# Altium PCB ControlBoard.PcbDoc (part 2 of 2)
Units mm, origin at the board's own origin, x right, y up, seen from the top; angles counter-clockwise.
Board outline 162.9 x 88.2 mm, 2 copper layers (Top Layer, Bottom Layer); 121 components, 97 nets, 597 pads, 175 vias.
Unrouted connection lines stored in the file: 4.
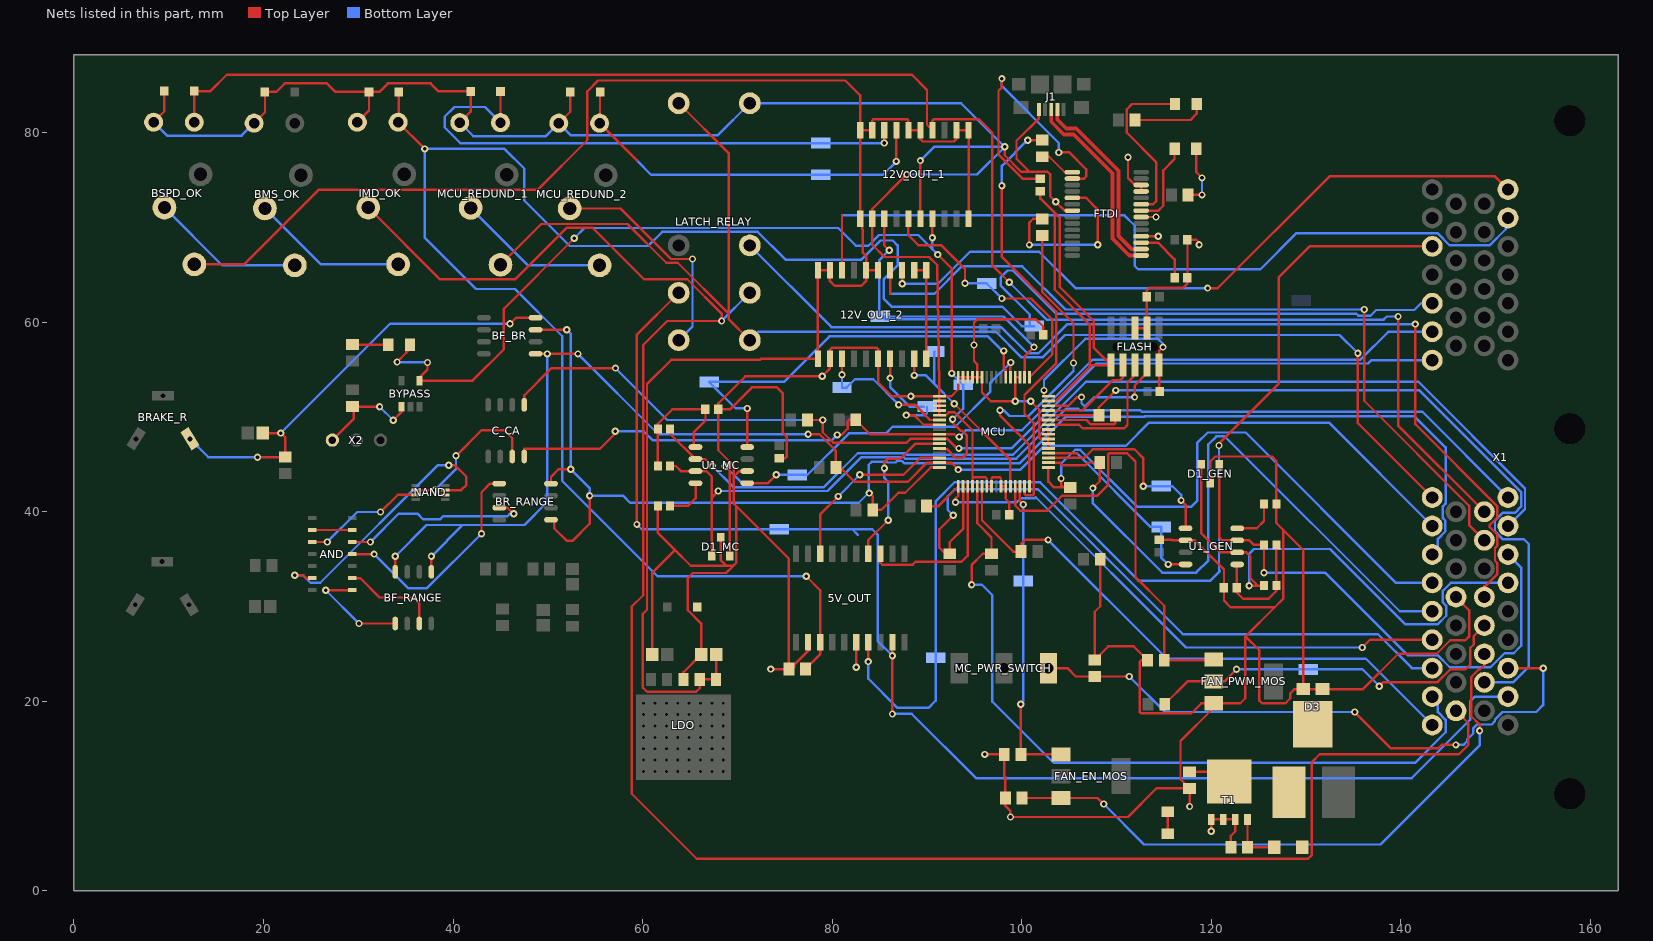
[diagram p2: the nets of this part, all layers, seen from the top]

## Via types
v1: diameter 0.762, hole 0.381, Top Layer to Bottom Layer, 175 vias

## Nets (pads, with @x,y where several pads share a name; then routed paths per layer and width w, separated by ;. In a path a pad name is that pad's centre, name@x,y a point inside that pad or via, vN(x,y) a via of type N, cw(c..) or ccw(c..) an arc to the next point about the centre after c; other vN are vias at no path point) (continued)
BRAKE_PRESSURE_FRONT: BF_BR.3 BR_RANGE.1 BR_RANGE.4 MCU.32 R14.2 X1.A7 | length 155.2
  Top Layer w0.254: BF_BR.3@48.725,59.196 v1(52,59.196) ; BR_RANGE.1@50.325,39.156 50.675,39.156 50.675,38.245 51.997,36.923 52.593,36.923 54.4,38.73 v1(54.4,41.7) ; BR_RANGE.4@50.325,42.966 50.325,43.673 51.149,44.497 v1(52.4,44.497) ; v1@83.982,41.935 84.275,41.642 R14.2@84.275,40.2 85.175,40.2 86.975,42 87.7,42 90.385,44.685 MCU.32@91.3,44.685
  Bottom Layer w0.254: v1(52,59.196) 52.4,58.796 v1(52.4,44.497) 54.4,42.497 v1(54.4,41.7) 57.931,41.7 58.674,40.957 82.791,40.957 v1@83.845,42.012 ; v1@83.982,41.935 v1(83.914,41.974) v1@83.845,42.012 ; X1.A7@143.3,35.5 143.891,35.5 143.891,37.141 144.679,37.929 144.679,39.071 144.421,39.329 144.421,40.571 144.704,40.854 144.704,46.787 141.427,50.063 112.981,50.063 112.951,50.034 104.678,50.034 99.744,45.1 93.578,45.1 93.568,45.11 93.021,45.11 93.011,45.1 87.633,45.1 87.373,45.36 86.827,45.36 86.667,45.2 85.833,45.2 85.773,45.26 84.147,45.26 83.845,44.958 v1@83.845,42.012
BRAKE_PRESSURE_REAR: BF_BR.1 BF_RANGE.1 BF_RANGE.4 MCU.31 R17.2 X1.A8 | length 150.9
  Top Layer w0.254: BF_RANGE.4@33.895,33.662 v1(33.895,35.297) ; BF_RANGE.1@37.705,33.662 v1(37.705,35.297) ; BF_BR.1@48.725,56.656 v1(49.936,56.656) v1(53.176,56.656) ; v1(77.455,48.185) 78.637,48.185 80.375,46.447 R17.2@80.375,44.685 80.848,44.685 82.379,43.155 87.958,43.155 89.988,45.185 MCU.31@91.3,45.185 92.559,45.185 v1(93.294,44.45)
  Bottom Layer w0.254: v1(33.895,35.297) 37.198,38.6 41.008,38.6 ; v1(37.705,35.297) 41.008,38.6 ; v1(49.936,56.656) 49.936,41.021 47.515,38.6 41.008,38.6 ; v1(53.176,56.656) 61.647,48.185 v1(77.455,48.185) ; v1(93.294,44.45) 99.85,44.45 102.356,46.956 110.956,46.956 113.4,49.4 132.4,49.4 X1.A8@143.3,38.5
BRAKE_REAR_POT: BF_BR.4 BRAKE_R.1 C15.2 R6.1 | length 47.4
  Top Layer w0.254: v1(19.357,45.761) 19.368,45.772 R6.1@22.3,45.772 22.3,47.819 v1(21.819,48.3) C15.2@19.925,48.3 ; v1(46.001,59.833) 46.634,60.466 BF_BR.4@48.725,60.466
  Bottom Layer w0.254: BRAKE_R.1@12.24,47.692 14.171,45.761 v1(19.357,45.761) ; v1(21.819,48.3) 33.352,59.833 v1(46.001,59.833)
BRK_RANGE_OK: AND.6 AND.9 | length 4.2
  Top Layer w0.254: AND.9@25.155,38.077 AND.6@29.366,38.077
BSPD_OK: 1.2 12V_OUT_1.14 BSPD_OK.COIL1 X1.A25 | length 178.2
  Top Layer w0.254: BSPD_OK.COIL1@12.699,81.1 12.675,81.124 1.2@12.675,84.386 14.4,84.386 16.114,86.1 88.4,86.1 90,84.5 90,80.827 12V_OUT_1.14@90.57,80.257 90.57,81.28 90.722,81.432 95.453,81.432 96.901,79.985 96.901,65.989 v1(98.673,64.218) ; v1(139.7,60.6) 139.7,49.1 X1.A25@148.8,40
  Bottom Layer w0.254: v1(98.673,64.218) 102.615,60.275 138.175,60.275 138.5,60.6 v1(139.7,60.6)
BSPD_OK_5V: 12V_OUT_1.7 bspd_ok.1 BSPD_OK.1 BYPASS.4 MCU.28 | length 105.4
  Top Layer w0.254: v1(34.087,55.804) 35.052,56.769 ; v1(37.3,55.749) 37.3,55.015 36.45,54.166 BYPASS.4@36.45,53.836 42.05,53.836 45.339,57.125 45.339,61.41 v1(52.785,68.856) ; v1(90.57,68.904) 12V_OUT_1.7@90.57,70.907 ; v1(91.135,67.132) 92.6,65.667 v1(92.6,54.6) ; MCU.28@91.3,46.685 91.371,46.614 92.091,46.614 93.02,45.685 93.749,45.685 94.2,46.136 94.2,48.033 93.673,48.56 93.532,48.56 92.7,49.392 v1(92.7,49.765) ; 35.052,56.769 35.052,57.636 BSPD_OK.1@35.45,57.636 35.45,57.167 35.052,56.769
  Bottom Layer w0.254: v1(34.087,55.804) 34.087,55.794 37.371,55.794 37.326,55.749 v1(37.3,55.749) ; v1(52.785,68.856) 53.864,69.935 80.636,69.935 82.499,68.072 83.82,68.072 84.948,69.2 89.067,69.2 90.57,67.697 ; v1(90.57,68.904) 90.57,67.697 ; v1(91.135,67.132) 90.57,67.697 ; v1(92.6,54.6) bspd_ok.1@93.8,53.4 93.8,50.865 v1(92.7,49.765) v1@92.7,49.622
CAN_H_GEN: D1_GEN.1 R3_GEN.2 U1_GEN.7 X1.A32 | length 58.1
  Top Layer w0.254: D1_GEN.1@120.85,45 120.85,37.283 121.148,36.985 U1_GEN.7@122.725,36.985 124.015,36.985 124.5,36.5 R3_GEN.2@125.55,36.5 v1(125.55,33.556)
  Bottom Layer w0.254: v1(125.55,33.556) 132.027,33.556 140.704,24.879 143.871,24.879 145.154,23.597 149.446,23.597 150.92,25.07 151.892,25.07 152.679,25.857 152.679,34.121 X1.A32@151.3,35.5
CAN_H_MC: D1_MC.1 R3_MC.2 U1_MC.7 X1.A34 | length 105.1
  Top Layer w0.254: R3_MC.2@62.9,44.827 63.489,44.827 64.024,44.292 U1_MC.7@65.575,44.292 66.708,44.292 67.3,43.7 67.3,41.519 ; D1_MC.1@67.3,35.332 67.3,41.519 ; v1(67.97,42.189) 67.3,41.519
  Bottom Layer w0.254: v1(67.97,42.189) 79.502,42.189 83.078,45.766 87.542,45.766 87.707,45.6 99.392,45.6 104.658,50.865 105.955,50.865 106.127,50.694 112.505,50.694 112.653,50.546 142.254,50.546 X1.A34@151.3,41.5
CAN_L_GEN: D1_GEN.2 R2_GEN.1 U1_GEN.6 X1.A31 | length 56.5
  Top Layer w0.254: D1_GEN.2@118.95,45 118.95,37.723 120.958,35.715 U1_GEN.6@122.725,35.715 123.685,35.715 124.1,35.3 124.1,33.02 124.92,32.2 ; v1(123.977,32.2) 124.92,32.2 ; R2_GEN.1@125.55,32.2 124.92,32.2
  Bottom Layer w0.254: v1(123.977,32.2) 123.977,35.56 124.485,36.068 132.512,36.068 140.462,28.118 143.868,28.118 144.78,29.03 144.78,30.07 144.421,30.429 144.421,31.671 145.25,32.5 X1.A31@151.3,32.5
CAN_L_MC: D1_MC.2 R2_MC.1 U1_MC.6 X1.A33 | length 122
  Top Layer w0.254: R2_MC.1@62.9,48.727 62.9,48.237 U1_MC.6@65.575,45.562 66.605,45.562 v1(67.361,44.806) ; v1(68.707,44.806) 69.19,44.323 69.19,37.363 ; 69.19,37.363 69.2,37.353 D1_MC.2@69.2,35.332 69.19,37.363
  Bottom Layer w0.254: v1(67.361,44.806) 69.571,42.596 70.917,42.596 ; v1(68.707,44.806) 70.917,42.596 ; X1.A33@151.3,38.5 153.085,40.285 153.085,42.47 141.834,53.721 106.763,53.721 99.048,46.006 87.876,46.006 87.71,46.172 82.697,46.172 79.121,42.596 70.917,42.596
CURRENT_SENSE_HIGH: C_CA.1 MCU.26 R20.2 X1.B1 | length 108.3
  Top Layer w0.254: C_CA.1@47.505,51.286 47.505,52.278 50.383,55.156 v1(57.137,55.156) ; R20.2@77.375,49.685 v1(79,49.685) ; v1@79.248,49.685 v1(79,49.685) ; v1(93.36,46.685) 93.157,46.685 92.157,47.685 MCU.26@91.3,47.685 88.249,47.685 87.859,47.295 80.102,47.295 79,48.396 v1(79,49.685)
  Bottom Layer w0.254: v1(57.137,55.156) 57.137,55.144 62.597,49.685 v1(79,49.685) ; v1(93.36,46.685) 98.92,46.685 107.878,55.643 136.525,55.643 136.882,56 X1.B1@143.3,56
CURRENT_SENSE_LOW: C_CA.8 MCU.25 R22.2 X1.B2 | length 104.7
  Top Layer w0.254: C_CA.8@47.505,45.836 47.505,46.634 55.474,46.634 57.1,48.261 v1(57.1,48.5) ; v1(80.518,48.108) 80.975,48.108 81.636,48.768 81.636,49.548 81.788,49.7 R22.2@82.475,49.7 83.99,48.185 MCU.25@91.3,48.185 92.869,48.185 ; 92.871,48.185 92.869,48.185 ; v1(93.4,47.9) 93.154,47.9 92.869,48.185
  Bottom Layer w0.254: v1(57.1,48.5) 60.1,48.5 61.075,47.525 79.935,47.525 v1(80.518,48.108) ; v1@93.314,47.9 v1(93.4,47.9) 94.1,48.6 100.035,48.6 107.484,56.049 135.729,56.049 138.68,59 X1.B2@143.3,59
D_N: FTDI.16 J1.2 | length 19.6
  Top Layer w0.381: J1.2@103.75,82.425 103.75,81.385 104.7,80.435 105.728,80.435 110.2,75.963 110.2,69.085 111.571,67.714 FTDI.16@112.586,67.714
D_P: FTDI.15 J1.3 | length 20.6
  Top Layer w0.381: J1.3@103.1,82.425 103.1,81.137 104.437,79.8 105.465,79.8 109.565,75.7 109.565,68.822 111.349,67.038 FTDI.15@112.586,67.038
DCDC_DISABLE: 12V_OUT_2.13 X1.B26 | length 73.8
  Top Layer w0.254: v1(87.375,64.059) 12V_OUT_2.13@87.375,65.475 ; v1(119.6,63.6) 120.674,63.6 132.461,75.387 149.913,75.387 X1.B26@151.3,74
  Bottom Layer w0.254: v1(87.375,64.059) 91.161,64.059 94.539,67.437 101.829,67.437 105.562,63.703 ; 105.563,63.704 105.667,63.6 v1(119.6,63.6)
DCDC_DISABLE_5V: 12V_OUT_2.9 dcdc_dis.1 MCU.44 | length 21.8
  Top Layer w0.254: v1(88.645,54.385) 12V_OUT_2.9@88.645,56.125 ; v1(92.869,51.4) 98.8,45.469 MCU.44@98.8,42.685
  Bottom Layer w0.254: v1(88.645,54.385) 89.884,54.385 90.751,53.518 ; dcdc_dis.1@90.8,56.9 90.751,56.851 90.751,53.518 ; v1(92.869,51.4) 90.751,53.518
DGND: 1.1 2.1 3.1 4.1 5.1 5V_OUT.2 5V_OUT.6 12V_OUT_1.2 12V_OUT_1.6 12V_OUT_2.2 12V_OUT_2.6 BMS_OK.COIL2 BSPD_OK.COIL2 C1_GEN.1 C1_MC.1 C2_GEN.1 C2_MC.1 C3.1 C4.1 C5.1 C6.1 C8.1 C10.1 C11.1 D1_GEN.3 D1_MC.3 D3.1 D3.2 FAN_PWM_MOS.3 FLASH.3 FLASH.5 FTDI.7 FTDI.18 FTDI.21 FTDI.25 FTDI.26 IMD_OK.COIL2 J1.5 LATCH_RELAY.1 LDO.3 MCU.3 MCU.4 MCU.11 MCU.12 MCU.13 MCU.14 MCU.15 MCU.16 MCU.17 MCU.18 MCU.19 MCU.20 MCU.21 MCU.36 MCU.39 MCU.40 MCU.42 MCU.43 MCU.53 MCU.54 MCU.55 MCU.56 MCU.57 MCU.59 MCU_REDUND_1.COIL2 MCU_REDUND_2.COIL2 R1_GEN.1 R1_MC.1 R12.2 R15.2 R18.2 R26.1 R27.1 R28.1 R29.1 R31.1 R32.1 T1.1 T1.2 T1.3 U1_GEN.2 U1_MC.2 X1.A14 | length 621
  Top Layer w0.254: BSPD_OK.COIL2@8.399,81.1 9.525,82.226 1.1@9.525,84.386 ; BMS_OK.COIL2@18.999,81 20.149,82.15 2.1@20.149,84.3 21.339,84.3 22.236,85.198 26.68,85.198 27.578,84.3 3.1@31.125,84.3 ; IMD_OK.COIL2@29.899,81.1 31.125,82.326 3.1@31.125,84.3 ; MCU_REDUND_1.COIL2@40.699,81.056 41.849,82.206 4.1@41.849,84.356 38.456,84.356 37.62,85.192 33.122,85.192 32.23,84.3 3.1@31.125,84.3 ; MCU_REDUND_2.COIL2@51.15,81 52.35,82.2 5.1@52.35,84.3 ; C4.1@61,24.95 61,33.528 63.421,35.949 ; R1_MC.1@61.6,40.627 61.6,37.769 63.421,35.949 ; LDO.3@64.3,22.325 64.3,23.071 66.163,24.934 C3.1@66.163,24.95 66.163,28.217 64.77,29.61 64.77,33.02 65.288,33.538 68.802,33.538 69.564,34.3 ; D1_MC.3@68.25,37.332 68.25,34.872 68.809,34.313 69.577,34.313 ; U1_MC.2@71.025,44.292 70.208,44.292 69.604,43.688 ; v1(73.5,23.4) R12.2@75.425,23.4 ; C1_MC.1@74.4,45.641 75.038,45.641 75.19,45.794 75.19,47.953 74.759,48.385 74.759,52.525 74.168,53.115 71.52,53.115 69.204,50.8 C2_MC.1@67.975,50.8 ; 5V_OUT.2@77.455,26.225 77.455,25.324 76,23.87 76,23.604 75.796,23.4 R12.2@75.425,23.4 ; v1(82.535,23.6) 5V_OUT.6@82.535,26.225 ; v1(87.849,75.585) 84.22,71.956 12V_OUT_1.2@84.22,70.907 84.22,68.17 85.514,66.876 90.224,66.876 91.072,66.028 91.3,53.3 MCU.17@91.3,52.185 ; 12V_OUT_1.6@89.3,70.907 v1(89.3,77.049) ; MCU.36@94.8,42.685 94.8,43.508 ; v1(96.1,14.4) R26.1@98.145,14.4 98.145,12.162 98.27,12.037 R27.1@98.27,9.8 98.27,8.964 98.8,8.434 v1(98.8,7.8) 111.2,7.8 114.225,10.825 R32.1@117.7,10.825 ; v1(98.2,78.5) 98.2,77.608 99.93,75.878 100.804,75.878 ; C8.1@98.675,39.7 98.675,40.993 98.3,41.368 MCU.43@98.3,42.685 MCU.42@97.8,42.685 97.8,43.508 97.648,43.66 96.952,43.66 96.8,43.508 MCU.40@96.8,42.685 MCU.39@96.3,42.685 96.3,43.508 96.148,43.66 94.952,43.66 94.8,43.508 ; MCU.3@99.8,54.185 MCU.4@99.3,54.185 v1(99.3,51.661) 96.739,51.661 95.8,52.6 MCU.11@95.8,54.185 MCU.12@95.3,54.185 ; v1(100.946,51.661) 101.835,50.772 101.835,49.558 ; J1.5@101.8,82.425 101.8,81.502 99.441,79.143 99.441,77.241 100.804,75.878 ; C6.1@102.275,58.7 102.275,59.512 101.487,60.3 95.3,60.3 94.952,59.952 v1(94.952,57.6) 94.952,55.902 95.3,55.555 MCU.12@95.3,54.185 ; MCU.53@102.8,46.685 MCU.54@102.8,47.185 MCU.55@102.8,47.685 ; MCU.57@102.8,48.685 MCU.56@102.8,48.185 MCU.55@102.8,47.685 ; FTDI.7@105.336,71.77 104.5,71.77 v1(103.57,72.7) 103,73.27 103,75.592 102.713,75.878 100.804,75.878 ; R15.2@108.275,35 108.275,30.024 107.7,29.449 R29.1@107.7,24.375 109.125,25.8 111.815,25.8 R28.1@113.275,24.34 112.588,24.34 112.452,24.204 112.452,18.87 112.579,18.743 117.888,18.743 118.945,19.8 FAN_PWM_MOS.3@120.193,19.8 ; R18.2@109.875,50.185 109.875,49.35 109.748,49.223 107.271,49.223 106.809,49.685 MCU.59@102.8,49.685 ; v1(111.2,77.4) 111.2,75.214 111.792,74.621 112.439,74.621 FTDI.26@112.586,74.474 FTDI.25@112.586,73.798 ; FLASH.5@111.945,59.375 FLASH.3@113.215,59.375 113.175,59.415 C5.1@113.175,62.7 113.175,63.32 113.51,63.655 117.055,63.655 117.475,64.075 C11.1@117.475,64.7 C10.1@117.475,68.7 118.4,68.7 118.7,68.4 v1(118.7,68.17) ; FTDI.18@112.586,69.066 v1(114.4,69.066) ; FTDI.21@112.586,71.094 v1(114.152,71.094) ; C1_GEN.1@114.5,37.065 115.83,37.065 115.91,36.985 U1_GEN.2@117.275,36.985 118.244,36.985 121.325,33.904 C2_GEN.1@121.325,32 121.325,30.622 122.028,29.919 126.676,29.919 ; v1(117.7,8.9) R32.1@117.7,10.825 ; D1_GEN.3@119.9,43 119.9,45.323 120.413,45.836 126.379,45.836 126.85,45.365 R1_GEN.1@126.85,40.8 126.85,38.813 127.565,38.098 ; v1(119.995,6.297) T1.1@119.995,7.544 T1.2@121.265,7.544 T1.3@122.535,7.544 122.535,6.297 122.055,5.817 R31.1@122.055,4.6 ; X1.A14@145.8,31 147.193,29.607 147.193,26.822 146.812,26.441 145.192,26.441 143.769,25.019 139.712,25.019 135.987,21.294 D3.1@131.716,21.294 D3.2@129.684,21.294 ; 63.421,35.949 65.069,34.3 69.564,34.3 ; C2_MC.1@67.975,50.8 67.975,46.492 69.604,44.862 69.604,43.688 ; C2_MC.1@67.975,50.8 67.975,51.44 70.835,54.3 v1(78.937,54.3) 79.755,55.118 12V_OUT_2.2@79.755,56.125 79.755,57.097 79.958,57.3 84.69,57.3 84.835,57.155 12V_OUT_2.6@84.835,56.125 84.835,53.665 86.315,52.185 v1(88.3,52.185) MCU.17@91.3,52.185 ; 69.564,34.3 69.577,34.313 ; 69.577,34.313 69.882,34.618 69.882,40.589 ; 69.604,43.688 69.604,40.866 69.882,40.589 ; 69.882,40.589 75.425,35.046 R12.2@75.425,23.4 ; MCU.17@91.3,52.185 MCU.18@91.3,51.685 MCU.19@91.3,51.185 MCU.20@91.3,50.685 MCU.21@91.3,50.185 91.985,50.185 92.3,50.5 92.899,50.5 93.36,50.039 93.5,49.899 93.5,49.894 94.8,48.594 94.8,43.508 ; MCU.17@91.3,52.185 92.564,52.185 93.3,52.921 MCU.16@93.3,54.185 MCU.15@93.8,54.185 MCU.14@94.3,54.185 MCU.13@94.8,54.185 MCU.12@95.3,54.185 ; 101.835,49.558 101.899,49.622 ; 101.835,49.558 101.835,47.812 101.962,47.685 MCU.55@102.8,47.685 ; 101.899,49.622 101.962,49.685 MCU.59@102.8,49.685 ; 101.899,49.622 MCU.59@102.8,49.685 ; R32.1@117.7,10.825 116.738,11.787 116.738,15.824 120.193,19.279 FAN_PWM_MOS.3@120.193,19.8 ; FAN_PWM_MOS.3@120.193,19.8 FAN_PWM_MOS.3@120.25,19.8 123.044,19.8 123.577,20.333 123.577,26.82 123.608,26.851 ; 123.608,26.851 126.676,29.919 ; 123.608,26.851 125.07,25.389 125.07,20.066 125.336,19.8 127.801,19.8 128.321,20.32 128.321,20.837 128.778,21.294 D3.2@129.684,21.294 ; 126.676,29.919 127.565,30.808 127.565,38.098 ; 127.565,38.098 129.684,35.979 D3.2@129.684,21.294
  Bottom Layer w0.254: BSPD_OK.COIL2@8.399,81.1 9.813,79.686 17.685,79.686 BMS_OK.COIL2@18.999,81 ; MCU_REDUND_1.COIL2@40.699,81.056 42.12,79.635 49.785,79.635 MCU_REDUND_2.COIL2@51.15,81 52.445,79.705 67.905,79.705 LATCH_RELAY.1@71.3,83.1 93.6,83.1 v1(98.2,78.5) ; v1(87.849,75.585) 95.285,75.585 v1(98.2,78.5) ; v1(89.3,77.049) 90.751,78.5 v1(98.2,78.5) ; v1(99.3,51.661) v1(100.946,51.661)
FAN: FAN_PWM_MOS.1 MCU.45 R28.2 | length 47.2
  Top Layer w0.254: MCU.45@99.3,42.685 99.3,40.659 99.854,40.105 102.668,40.105 104.267,41.705 107.982,41.705 109.099,42.822 109.099,46.048 109.226,46.175 111.106,46.175 111.995,45.286 111.995,33.119 115.025,30.089 R28.2@115.025,24.34 120.19,24.34 FAN_PWM_MOS.1@120.25,24.4
FAN_ENABLE_DRIVE: FAN_EN_MOS.3 R27.2 X1.A20 | length 65.3
  Top Layer w0.254: R27.2@100.02,9.8 FAN_EN_MOS.3@104.15,9.8 108.001,9.8 v1(108.631,9.169) ; v1(148.3,16.9) 148.3,17.55 147.421,18.429 147.421,22.571 148.229,23.379 148.336,23.379 148.8,23.843 X1.A20@148.8,25
  Bottom Layer w0.254: v1(108.631,9.169) 108.636,9.169 112.905,4.9 137.844,4.9 148.3,15.356 v1(148.3,16.9)
FAN_ENABLE_MCU: fan_en.1 FAN_EN_MOS.1 MCU.46 R26.2 | length 32.8
  Top Layer w0.254: MCU.46@99.8,42.685 99.8,41.123 v1(100.159,40.765) ; v1(99.895,19.695) R26.2@99.895,14.4 FAN_EN_MOS.1@104.15,14.4
  Bottom Layer w0.254: v1(99.895,19.695) 100.159,19.959 fan_en.1@100.159,32.7 v1(100.159,40.765)
FAN_PWM: fan_pwm.1 FAN_PWM_MOS.2 R25.1 X1.A21 | length 40.2
  Top Layer w0.254: R25.1@115.075,19.7 117.475,22.1 FAN_PWM_MOS.2@120.25,22.1 121.372,22.1 v1(122.651,23.379) ; v1(137.719,21.59) 138.151,22.022 143.872,22.022 145.229,23.379 146.812,23.379 147.32,23.887 147.32,25.654 147.676,26.01 147.676,26.876 X1.A21@148.8,28
  Bottom Layer w0.254: v1(122.651,23.379) fan_pwm.1@130.2,23.379 135.93,23.379 v1(137.719,21.59)
FTDI_GREEN: FTDI.23 FTDI_GRN.2 | length 18
  Top Layer w0.254: FTDI.23@112.586,72.446 113.846,72.446 114.2,72.8 114.2,76.863 111.081,79.982 111.081,82.472 111.631,83.022 FTDI_GRN.2@116.162,83.022
FTDI_RED: FTDI.22 FTDI_RED.2 | length 9.1
  Top Layer w0.254: FTDI.22@112.586,71.77 114.408,71.77 114.916,72.278 114.916,74.916 114.916,76.02 116.112,77.216 FTDI_RED.2@116.112,78.297
FTDI_UART_RX: MCU.48 R34.2 | length 34.9
  Top Layer w0.254: v1(97.7,50.7) 97.7,50.15 100.8,47.05 MCU.48@100.8,42.685 ; R34.2@102.162,69.157 102.162,63.186 105.454,59.895 v1(105.454,55.7)
  Bottom Layer w0.254: v1(97.7,50.7) 98.109,50.7 98.709,50.1 100.705,50.1 105.454,54.848 v1(105.454,55.7)
FTDI_UART_TX: MCU.47 R33.2 | length 46.1
  Top Layer w0.254: v1(97.898,74.394) 97.898,66.876 103.613,61.161 103.613,55.649 100.286,52.321 100.286,50.34 101.251,49.375 101.251,41.857 101.124,41.73 100.427,41.73 100.3,41.857 MCU.47@100.3,42.685 ; v1(100.616,79.207) R33.2@102.162,79.207
  Bottom Layer w0.254: v1(97.898,74.394) 97.898,76.49 v1(100.616,79.207)
GLV: 12V_OUT_1.1 12V_OUT_1.10 12V_OUT_1.11 12V_OUT_1.12 12V_OUT_1.15 12V_OUT_1.16 12V_OUT_1.19 12V_OUT_1.20 12V_OUT_2.1 12V_OUT_2.10 12V_OUT_2.11 12V_OUT_2.12 12V_OUT_2.15 12V_OUT_2.16 12V_OUT_2.19 12V_OUT_2.20 BSPD_OK.COM C3.2 D2.2 D3.3 LDO.1 LDO.2 LDO_D.2 PTC.2 R32.2 RVP_LED.1 RVP_LED.2 T1.mb | length 224.5
  Top Layer w0.254: BSPD_OK.COM@12.699,66.1 17.942,66.1 25.806,73.965 48.92,73.965 54.153,79.197 54.153,84.353 55.299,85.5 81.378,85.5 82.95,83.928 12V_OUT_1.20@82.95,80.257 ; C3.2@67.763,24.95 67.763,22.348 LDO.1@67.74,22.325 LDO.2@66.02,22.325 66.02,21.384 65.64,21.004 60.458,21.004 60.027,21.435 60.027,29.233 60.458,29.664 60.458,53.464 63.024,56.031 72.412,56.031 72.507,56.125 12V_OUT_2.1@78.485,56.125 12V_OUT_2.20@78.485,65.475 12V_OUT_2.19@79.755,65.475 79.755,64.336 80.263,63.828 83.057,63.828 83.565,64.336 12V_OUT_2.16@83.565,65.475 ; 12V_OUT_2.15@84.835,65.475 12V_OUT_2.16@83.565,65.475 ; 12V_OUT_2.12@88.645,65.475 12V_OUT_2.11@89.915,65.475 12V_OUT_2.10@89.915,56.125 ; 12V_OUT_1.10@94.38,70.907 12V_OUT_1.11@94.38,80.257 12V_OUT_1.12@93.11,80.257 93.11,79.322 92.856,79.068 89.554,79.068 89.3,79.322 12V_OUT_1.15@89.3,80.257 12V_OUT_1.16@88.03,80.257 88.03,81.28 87.89,81.42 84.36,81.42 84.22,81.28 12V_OUT_1.19@84.22,80.257 12V_OUT_1.20@82.95,80.257 ; RVP_LED.1@115.4,6.05 RVP_LED.2@115.4,8.35 ; R32.2@117.7,12.575 120.125,12.575 121.156,11.544 T1.mb@121.9,11.544 ; 12V_OUT_1.20@82.95,80.257 12V_OUT_1.1@82.95,70.907 83.213,69.659 83.213,67.343 83.565,66.991 12V_OUT_2.16@83.565,65.475
IMD_OK: 3.2 5V_OUT.3 imd_ok.1 IMD_OK.COIL1 R12.1 X1.B3 | length 228.7
  Top Layer w0.254: 3.2@34.275,84.3 34.275,81.176 IMD_OK.COIL1@34.199,81.1 v1(37.016,78.283) ; R12.1@77.175,23.4 78.725,24.95 5V_OUT.3@78.725,26.225 78.725,31.725 v1(77.252,33.198)
  Bottom Layer w0.254: v1(77.252,33.198) 61.57,33.198 51.511,43.256 51.511,58.522 46.533,63.5 42.4,63.5 37.016,68.884 v1(37.016,78.283) 45.417,78.283 47.5,76.2 47.5,72.847 52.307,68.04 60.572,68.04 62.061,69.529 72.136,69.529 75.066,66.599 83.083,66.599 85.1,68.615 86.385,68.615 86.9,68.1 86.9,65.996 85.42,64.516 85.42,62.484 86.258,61.646 97.942,61.646 100,59.588 imd_ok.1@100.838,59.588 ; imd_ok.1@101.3,59.588 imd_ok.1@100.838,59.588 ; X1.B3@143.3,62 142.112,62 141.402,61.29 137.388,61.29 136.779,60.681 135.509,60.681 135.281,60.909 103.607,60.909 99.06,65.456 98.501,65.456 97.76,64.715 97.76,63.885 100.838,60.807 imd_ok.1@100.838,59.588
IMD_OK_5V: 5V_OUT.18 MCU.30 | length 19.2
  Top Layer w0.254: 5V_OUT.18@78.725,35.575 78.725,39.717 v1(80.625,41.617) ; v1(82.908,43.9) 87.5,43.9 89.285,45.685 MCU.30@91.3,45.685
  Bottom Layer w0.254: v1(80.625,41.617) v1(82.908,43.9)
JTAG_TCLK: FLASH.4 MCU.62 | length 14.6
  Top Layer w0.254: MCU.62@102.8,51.185 104.91,51.185 105.225,51.5 105.825,52.1 v1(106.3,52.1) ; v1(111.9,52.1) 111.9,53.281 111.885,53.296 113.215,54.626 FLASH.4@113.215,55.475
  Bottom Layer w0.254: v1(106.3,52.1) 106.3,51.454 106.654,51.1 107.654,52.1 v1(111.9,52.1)
JTAG_TDI: FLASH.8 MCU.61 | length 10.6
  Top Layer w0.254: MCU.61@102.8,50.685 106.4,50.685 109.609,53.894 110.393,53.894 110.675,54.176 FLASH.8@110.675,55.475
JTAG_TDO: FLASH.6 MCU.58 | length 15.3
  Top Layer w0.254: MCU.58@102.8,49.185 106.047,49.185 106.415,48.817 110.817,48.817 111.15,49.15 111.15,53.65 111.945,54.445 FLASH.6@111.945,55.475
JTAG_TMS: FLASH.2 MCU.64 R30.1 | length 22
  Top Layer w0.254: v1(102.343,52.804) 102.343,52.185 MCU.64@102.8,52.185 ; R30.1@114.55,52.7 114.495,52.7 114.495,55.465 FLASH.2@114.485,55.475 114.485,56.971 v1(114.891,57.376)
  Bottom Layer w0.254: v1(102.343,52.804) 102.343,53.897 106.686,58.24 114.383,58.24 114.891,57.732 v1(114.891,57.376)
LATCH_BTN_IN: LATCH_RELAY.4 LATCH_RELAY.8 MCU_REDUND_1.COM X1.A9 | length 143.8
  Top Layer w0.254: MCU_REDUND_1.COM@44.999,66.056 49.301,70.358 58.391,70.358 62.484,66.265 63.694,66.265 69.1,60.859 ; LATCH_RELAY.8@63.8,83.1 69.1,77.8 69.1,60.859 ; LATCH_RELAY.4@71.3,58.1 69.1,60.3 69.1,60.859 ; v1(135.458,56.718) 135.458,49.342 X1.A9@143.3,41.5
  Bottom Layer w0.254: LATCH_RELAY.4@71.3,58.1 72.204,59.004 97.257,59.004 99.974,56.286 102.184,56.286 104.546,58.649 133.528,58.649 v1(135.458,56.718)
LATCH_BTN_OUT: IMD_OK.NO LATCH_RELAY.3 X1.A10 | length 214.5
  Top Layer w0.254: IMD_OK.NO@31.049,72.1 38.633,64.516 46.533,64.516 51.968,69.952 54.725,69.952 60.147,64.529 64.708,64.529 68.322,60.915 v1(68.322,60.122) 62.586,60.122 60.052,57.588 60.052,31.197 58.852,29.997 58.852,10.248 65.7,3.4 130.2,3.4 130.6,3.8 130.6,13.583 131.433,14.416 146.116,14.416 147.1,15.4 147.1,17.7 X1.A10@145.8,19
  Bottom Layer w0.254: v1(68.322,60.122) LATCH_RELAY.3@71.3,63.1
LATCH_LED: LATCH_RELAY.2 X1.A22 | length 110.1
  Top Layer w0.254: v1(141.5,59.8) 141.5,49.25 150.179,40.571 150.179,39.429 149.377,38.627 149.377,38.373 150.179,37.571 150.179,36.429 149.921,36.171 149.921,34.829 150.179,34.571 150.179,33.429 148.902,32.152 148.8,32.152 X1.A22@148.8,31
  Bottom Layer w0.254: LATCH_RELAY.2@71.3,68.1 79.913,59.487 97.815,59.487 100.586,56.716 101.75,56.716 104.834,59.8 v1(141.5,59.8)
MC_EN: MCU.60 R18.1 X1.A19 | length 84.4
  Top Layer w0.254: MCU.60@102.8,50.185 107.125,50.185 R18.1@108.125,50.185 108.125,51.026 v1(109.906,52.807)
  Bottom Layer w0.254: v1(109.906,52.807) 141.944,52.807 152.679,42.071 152.679,40.538 152.02,39.879 150.729,39.879 149.921,39.071 149.921,37.929 150.729,37.121 152.947,37.121 153.492,36.576 153.492,23.673 151.819,22 X1.A19@148.8,22
MC_PWR_EN: MC_PWR_SWITCH.1 R29.2 X1.A28 | length 65.8
  Top Layer w0.254: MC_PWR_SWITCH.1@102.8,23.5 104.807,23.5 105.682,22.625 R29.2@107.7,22.625 v1(111.335,22.625) ; v1(135.128,18.872) 135.1,18.87 138.908,15.062 143.962,15.062 144.3,15.4 v1(145.8,15.4) ; X1.A28@151.3,23.5 v1(155,23.5)
  Bottom Layer w0.254: v1(111.335,22.625) 115.087,18.872 v1(135.128,18.872) ; v1(145.8,15.4) 146.6,15.4 147,15.8 147,15.987 147.64,16.627 147.64,17.173 148.027,17.56 149.57,17.56 149.921,17.911 149.921,18.071 150.729,18.879 154.279,18.879 155,19.6 v1(155,23.5)
MCU_REDUN_1_5V: 12V_OUT_1.3 MCU.2 redun1.1 | length 45.4
  Top Layer w0.254: 12V_OUT_1.3@85.49,70.907 85.49,68.104 v1(86.004,67.589) ; MCU.2@100.3,54.185 100.3,56.398 v1(101.279,57.376)
  Bottom Layer w0.254: redun1.1@85.048,60.6 redun1.1@85.239,60.6 ; v1(86.004,67.589) 84.969,66.554 84.969,60.869 85.143,60.695 redun1.1@85.239,60.6 ; v1(101.279,57.376) 98.332,60.323 ; redun1.1@85.239,60.6 85.516,60.323 98.332,60.323 ; redun1.1@85.239,60.6 98.055,60.6 98.332,60.323
MCU_REDUN_1_12V: 4.2 12V_OUT_1.18 MCU_REDUND_1.COIL1 redun1_shtdn.1 | length 59.9
  Top Layer w0.254: MCU_REDUND_1.COIL1@44.999,81.056 4.2@44.999,84.356 ; v1(85.49,78.9) 12V_OUT_1.18@85.49,80.257
  Bottom Layer w0.254: MCU_REDUND_1.COIL1@44.999,81.056 43.353,82.702 40.132,82.702 39.1,81.67 39.1,80.559 40.759,78.9 redun1_shtdn.1@78.8,78.9 v1(85.49,78.9)
MCU_REDUN_2_5V: 12V_OUT_1.5 MCU.1 redun2.1 | length 28.6
  Top Layer w0.254: 12V_OUT_1.5@88.03,70.907 88.03,69.17 89.068,68.132 91.468,68.132 94,65.6 v1(94,64.1) ; v1(97.9,62.5) 100.979,62.5 103.207,60.272 103.207,56.592 MCU.1@100.8,54.185
  Bottom Layer w0.254: v1(94,64.1) redun2.1@96.3,64.1 v1(97.9,62.5)
MCU_REDUN_2_12V: 5.2 12V_OUT_1.17 MCU_REDUND_2.COIL1 redun2_shtdn.1 | length 40.8
  Top Layer w0.254: 5.2@55.5,84.3 55.5,81.05 MCU_REDUND_2.COIL1@55.45,81 59.4,77.05 ; v1(86.76,76.96) 12V_OUT_1.17@86.76,80.257
  Bottom Layer w0.254: 59.4,77.05 60.894,75.556 redun2_shtdn.1@78.8,75.556 85.356,75.556 v1(86.76,76.96)
NAND1: AND.10 NAND.7 | length 13
  Top Layer w0.254: AND.10@25.155,36.807 v1(26.711,36.807) ; v1(32.34,39.975) 34.152,41.787 NAND.7@36.05,41.787
  Bottom Layer w0.254: v1(26.711,36.807) 29.879,39.975 v1(32.34,39.975)
NAND2: AND.13 NAND.3 | length 29.4
  Top Layer w0.254: v1(23.299,33.3) 24.171,33.3 24.474,32.997 AND.13@25.155,32.997 ; NAND.3@39.15,42.287 39.6,42.287 40.847,42.287 41.4,42.84 41.4,43.7 40.203,44.897 v1(39.541,44.897)
  Bottom Layer w0.254: v1(23.299,33.3) 24.171,33.3 24.959,32.512 25.975,32.512 38.359,44.897 v1(39.541,44.897)
NetBMS_OK_COM: BMS_OK.COM BSPD_OK.NO | length 16.3
  Bottom Layer w0.254: BSPD_OK.NO@9.549,72.1 15.649,66 BMS_OK.COM@23.299,66
NetBMS_OK_NO: BMS_OK.NO IMD_OK.COM | length 16.5
  Bottom Layer w0.254: BMS_OK.NO@20.149,72 26.049,66.1 IMD_OK.COM@34.199,66.1
NetBSPD_OK_2: BSPD_OK.2 R10.2 | length 3.8
  Top Layer w0.254: R10.2@29.4,57.636 29.4,57.623 33.15,57.623 BSPD_OK.2@33.15,57.636
NetC2_GEN_2: C2_GEN.2 R2_GEN.2 R3_GEN.1 U1_GEN.5 | length 12.7
  Top Layer w0.254: U1_GEN.5@122.725,34.445 122.675,34.445 C2_GEN.2@122.675,32 122.675,31.494 123.346,30.823 126.04,30.823 126.85,31.634 R2_GEN.2@126.85,32.2 126.86,32.2 126.86,36.5 R3_GEN.1@126.85,36.5
NetC2_MC_2: C2_MC.2 R2_MC.2 R3_MC.1 U1_MC.5 | length 14.8
  Top Layer w0.254: R3_MC.1@61.6,44.827 R2_MC.2@61.6,48.727 61.6,49.288 63.112,50.8 C2_MC.2@66.625,50.8 66.625,49.625 65.371,48.371 65.371,46.832 U1_MC.5@65.575,46.832
NetC9_1: C9.1 FTDI.2 | length 29.9
  Top Layer w0.254: v1(97.898,85.698) 97.898,84.771 97.54,84.413 97.54,77.694 100.085,75.149 C9.1@101.962,75.149 ; v1(103.9,77.9) 103.9,77.94 104.985,77.94 106.8,76.125 106.8,75.4 106.55,75.15 FTDI.2@105.336,75.15
  Bottom Layer w0.254: v1(97.898,85.698) 97.898,84.902 103.9,78.9 v1(103.9,77.9)
NetD2_1: D2.1 R31.2 T1.4 | length 5.8
  Top Layer w0.254: T1.4@123.805,7.544 R31.2@123.805,4.6 126.525,4.6 D2.1@126.625,4.5
NetFTDI_1: FTDI.1 R33.1 | length 3.8
  Top Layer w0.254: R33.1@102.162,77.457 102.896,77.457 104.527,75.826 FTDI.1@105.336,75.826
NetFTDI_5: FTDI.5 R34.1 | length 18
  Top Layer w0.254: v1(100.802,68.152) 100.802,70.509 101.2,70.907 R34.1@102.162,70.907 ; FTDI.5@105.336,73.122 106.778,73.122 108,71.9 v1(108,68.17)
  Bottom Layer w0.254: v1(100.802,68.152) 100.82,68.17 v1(108,68.17)
NetGRN_1: FTDI_GRN.1 R35.1 | length 7.8
  Top Layer w0.254: R35.1@111.937,81.332 117.785,81.332 118.462,82.009 FTDI_GRN.1@118.462,83.022
NetLATCH_RELAY_5: LATCH_RELAY.5 MCU_REDUND_2.NO | length 24.3
  Top Layer w0.254: MCU_REDUND_2.NO@52.3,72 57.663,72 62.992,66.671 v1(65.253,66.671)
  Bottom Layer w0.254: LATCH_RELAY.5@63.8,58.1 65.253,59.553 v1(65.253,66.671)
NetMCU_5: MCU.5 tx_mc.1 U1_MC.1 | length 35.2
  Top Layer w0.254: U1_MC.1@71.025,43.022 73.222,43.022 v1(74.1,43.9) ; MCU.5@98.8,54.185 98.8,55.719 v1(98.83,55.749)
  Bottom Layer w0.254: v1(74.1,43.9) tx_mc.1@76.3,43.9 77.383,43.9 81.754,48.27 85.669,48.27 86.365,48.966 92.978,48.966 96.648,52.636 96.648,53.568 v1(98.83,55.749)
NetMCU_6: MCU.6 rx_mc.1 U1_MC.4 | length 45.6
  Top Layer w0.254: U1_MC.4@71.025,46.832 v1(71.025,50.9) ; v1(98.1,56.971) 98.1,55.2 98.3,55 MCU.6@98.3,54.185
  Bottom Layer w0.254: v1(71.025,50.9) 69.812,50.9 rx_mc.1@67.012,53.7 74.9,53.7 79.7,58.5 96.416,58.5 v1@97.916,57
NetMCU_51: MCU.51 tx_gen.1 U1_GEN.1 | length 21.9
  Top Layer w0.254: MCU.51@102.8,45.685 106.585,45.685 107.5,46.6 111.885,46.6 112.8,45.685 v1(112.8,42.7) ; v1(116.8,41.2) 117.275,40.725 U1_GEN.1@117.275,38.255
  Bottom Layer w0.254: v1(112.8,42.7) tx_gen.1@114.7,42.7 115.9,42.7 116.8,41.8 v1(116.8,41.2)
NetMCU_52: MCU.52 rx_gen.1 U1_GEN.4 | length 21.2
  Top Layer w0.254: MCU.52@102.8,46.185 105.807,46.185 105.848,46.144 ; v1(115.441,34.445) U1_GEN.4@117.275,34.445
  Bottom Layer w0.254: 105.896,46.096 113.592,38.4 rx_gen.1@114.7,38.4 114.7,35.186 v1(115.441,34.445)
NetMCU_REDUND_1_NO: MCU_REDUND_1.NO MCU_REDUND_2.COM | length 16.1
  Bottom Layer w0.254: MCU_REDUND_1.NO@41.849,72.056 47.905,66 MCU_REDUND_2.COM@55.45,66
NetR1_GEN_2: R1_GEN.2 U1_GEN.8 | length 4.9
  Top Layer w0.254: U1_GEN.8@122.725,38.255 124.78,38.255 125.55,39.025 R1_GEN.2@125.55,40.8
NetR1_MC_2: R1_MC.2 U1_MC.8 | length 4.6
  Top Layer w0.254: R1_MC.2@62.9,40.627 64.786,40.627 65.599,41.44 65.599,43.022 U1_MC.8@65.575,43.022
NetR11_2: BYPASS.1 R11.2 X2.3 | length 11
  Top Layer w0.254: X2.3@27.26,47.561 29.5,49.801 29.5,51.086 v1(32.244,51.086) ; v1(33.678,49.651) 34.55,50.523 BYPASS.1@34.55,51.086
  Bottom Layer w0.254: v1(32.244,51.086) v1(33.678,49.651)
NetR36_1: FTDI_RED.1 R36.1 | length 6.6
  Top Layer w0.254: R36.1@117.537,73.432 v1(119.013,73.432) ; FTDI_RED.1@118.412,78.297 118.412,75.825 v1(119.013,75.224)
  Bottom Layer w0.254: v1(119.013,73.432) v1(119.013,75.224)
NetU2_5: AND.1 BF_RANGE.5 | length 11.6
  Top Layer w0.254: v1(26.56,31.727) AND.1@29.366,31.727 ; v1(30.075,28.212) BF_RANGE.5@33.895,28.212
  Bottom Layer w0.254: v1(26.56,31.727) v1(30.075,28.212)
NetU2_7: AND.2 BF_RANGE.7 | length 10.3
  Top Layer w0.254: AND.2@29.366,32.997 30.203,32.997 32.247,30.953 35.816,30.953 36.435,30.334 BF_RANGE.7@36.435,28.212
NetU3_4: AND.4 BR_RANGE.5 | length 24.1
  Top Layer w0.254: AND.4@29.366,35.537 v1(31.664,35.537) ; v1(42.993,37.687) 42.993,42.067 43.892,42.966 BR_RANGE.5@44.875,42.966
  Bottom Layer w0.254: v1(31.664,35.537) 35.257,31.943 37.249,31.943 v1(42.993,37.687)
NetU3_5: AND.5 BR_RANGE.7 | length 20.6
  Top Layer w0.254: AND.5@29.366,36.807 v1(31.269,36.807) ; BR_RANGE.7@44.875,40.426 45.722,40.426 46.348,39.8 v1(46.4,39.8)
  Bottom Layer w0.254: v1(31.269,36.807) 34.262,39.8 36.247,39.8 36.847,39.2 38.618,39.2 38.947,39.529 45.73,39.529 46.001,39.8 v1(46.4,39.8)
NetU7_2: C_CA.7 NAND.2 NAND.6 | length 17.2
  Top Layer w0.254: NAND.6@36.05,42.287 v1(38.074,42.287) 38.574,41.787 NAND.2@39.15,41.787 ; v1(40.3,45.9) 43,48.6 45.385,48.6 46.235,47.75 C_CA.7@46.235,45.836
  Bottom Layer w0.254: v1(38.074,42.287) 40.3,44.513 v1(40.3,45.9)
PRECHARGE_DONE: 12V_OUT_2.18 X1.B25 | length 84.7
  Top Layer w0.254: 12V_OUT_2.18@81.025,65.475 81.025,71.297
  Bottom Layer w0.254: 81.025,71.297 81.026,71.298 110.795,71.298 111.912,70.18 111.912,65.938 112.268,65.583 125.171,65.583 128.981,69.393 143.857,69.393 145.153,68.097 149.348,68.097 151.053,69.803 X1.B25@151.3,71
PRECHARGE_DONE_5V: 12V_OUT_2.3 MCU.22 prechrg.1 | length 15.4
  Top Layer w0.254: v1(81.025,54.463) 12V_OUT_2.3@81.025,56.125 ; v1(87,51.3) 88.714,51.3 90.329,49.685 MCU.22@91.3,49.685
  Bottom Layer w0.254: v1(81.025,54.463) prechrg.1@81.025,53.1 81.52,53.1 82.402,53.982 84.318,53.982 v1(87,51.3)
RESET: C9.2 FLASH.10 MCU.63 | length 47.4
  Top Layer w0.254: C9.2@101.962,73.799 101.962,73.038 103.486,71.514 ; MCU.63@102.8,51.685 103.613,51.685 107.152,55.224 ; 103.486,71.514 103.996,71.004 103.996,63.704 107.6,60.1 107.6,57.28 FLASH.10@109.405,55.475 107.403,55.475 107.152,55.224 ; 103.486,71.514 103.486,63.431 107.152,59.766 107.152,55.224
RTDS: 12V_OUT_2.14 X1.A24 | length 85.2
  Top Layer w0.254: 86.105,62.993 12V_OUT_2.14@86.105,65.475 ; v1(136.119,61.341) 136.119,51.714 147.193,40.64 147.193,38.607 X1.A24@148.8,37
  Bottom Layer w0.254: 86.105,62.993 86.106,62.992 90.754,62.992 93.649,65.887 100.05,65.887 104.596,61.341 v1(136.119,61.341)
RTDS_5V: 12V_OUT_2.7 MCU.23 rtds.1 | length 14.3
  Top Layer w0.254: v1(86.105,54.105) 12V_OUT_2.7@86.105,56.125 ; v1(87.8,50.2) 88.633,50.2 89.648,49.185 MCU.23@91.3,49.185
  Bottom Layer w0.254: v1(86.105,54.105) 86.105,53.155 88.16,51.1 rtds.1@89.632,51.1 ; v1(87.8,50.2) 89.8,50.2 90,50.4 rtds.1@90,51.1
SHUTDOWN_OK: 5V_OUT.9 LATCH_RELAY.6 shtdn_ok.1 X1.A27 | length 146.3
  Top Layer w0.254: v1(59.392,38.668) 59.392,58.692 LATCH_RELAY.6@63.8,63.1 ; v1(86.345,18.669) v1(86.345,24.816) 5V_OUT.9@86.345,26.225
  Bottom Layer w0.254: v1(59.392,38.668) 59.9,38.16 shtdn_ok.1@74.4,38.16 82.109,38.16 ; 82.677,37.592 82.109,38.16 ; v1(86.345,18.669) 88.392,18.669 95.161,11.9 141.135,11.9 147.295,18.059 147.295,19.967 147.828,20.5 X1.A27@151.3,20.5 ; v1(86.345,24.816) 84.785,26.376 84.785,37.592 84.217,38.16 82.109,38.16
SHUTDOWN_OK_5V: 5V_OUT.13 MCU.35 | length 18
  Top Layer w0.254: 5V_OUT.13@85.075,35.575 85.075,34.618 85.278,34.415 88.475,34.415 88.779,34.72 93.64,34.72 94.3,35.38 MCU.35@94.3,42.685
SHUTDOWN_SENSE: 5V_OUT.7 shtdn_sen.1 X1.B5 | length 120.3
  Top Layer w0.254: v1(83.805,24.196) 5V_OUT.7@83.805,26.225 ; v1(120.8,46.995) 120.8,47.191 127.127,53.518 127.127,64.77 130.357,68 X1.B5@143.3,68
  Bottom Layer w0.254: v1(83.805,24.196) 83.805,22.395 86.896,19.304 90.145,19.304 90.9,20.059 shtdn_sen.1@90.9,24.6 90.9,41.1 92.908,43.108 101.926,43.108 112.293,32.741 119.888,32.741 120.904,33.757 120.8,33.861 v1(120.8,46.995)
SHUTDOWN_SENSE_5V: 5V_OUT.14 MCU.27 | length 17.3
  Top Layer w0.254: 5V_OUT.14@83.805,35.575 83.805,37.005 v1(85.9,39.1) ; v1(85.5,44.6) 85.5,45.269 85.816,45.585 87.173,45.585 88.773,47.185 MCU.27@91.3,47.185
  Bottom Layer w0.254: v1(85.5,44.6) 85.5,43.569 85.9,43.169 v1(85.9,39.1)
THROTTLE_1: MCU.50 R23.1 X1.A5 | length 69.9
  Top Layer w0.254: MCU.50@102.8,45.185 103.966,45.185 104.254,44.897 106.651,44.897 106.955,45.2 R23.1@108.225,45.2 108.225,43.225 v1(107.5,42.5)
  Bottom Layer w0.254: v1(107.5,42.5) 107.5,40.887 114.808,33.579 118.389,33.579 119.685,34.874 119.685,47.117 120.523,47.955 121.412,47.955 139.867,29.5 X1.A5@143.3,29.5
THROTTLE_2: MCU.49 R24.1 X1.A6 | length 62.3
  Top Layer w0.254: MCU.49@102.8,44.685 102.8,43.18 103.405,42.575 104.394,42.575 ; v1(104.14,43.51) 104.14,42.829 104.394,42.575 ; R24.1@105.114,42.575 104.394,42.575
  Bottom Layer w0.254: v1(104.14,43.51) 104.14,45.06 105.631,46.55 106.155,46.55 112.192,40.513 117.856,40.513 118.491,41.148 118.491,47.244 119.608,48.361 123.623,48.361 139.483,32.5 X1.A6@143.3,32.5
VCC_3V3: C11.2 FTDI.17 | length 6.2
  Top Layer w0.254: FTDI.17@112.586,68.39 114.364,68.39 116.125,66.63 C11.2@116.125,64.7
WHEELSPEED_FL: MCU.38 R13.1 X1.A1 | length 61.5
  Top Layer w0.254: MCU.38@95.8,42.685 95.8,39.1 99.1,35.8 R13.1@99.925,35.8 99.925,36.628 100.33,37.033 v1(102.768,37.033)
  Bottom Layer w0.254: v1(102.768,37.033) 115.291,24.511 136.289,24.511 X1.A1@143.3,17.5
WHEELSPEED_FR: MCU.37 R16.1 X1.A2 | length 82.5
  Top Layer w0.254: v1(94.7,32.3) 94.7,34.4 95.875,35.575 R16.1@96.8,35.575 96.8,37.3 95.3,38.8 MCU.37@95.3,42.685
  Bottom Layer w0.254: v1(94.7,32.3) 95.8,32.3 96.901,31.199 96.901,19.964 103.365,13.5 141.465,13.5 144.704,16.739 144.704,18.046 143.891,18.859 143.891,19.909 X1.A2@143.3,20.5
WHEELSPEED_RL: MCU.34 R19.1 X1.A3 | length 74.6
  Top Layer w0.254: v1(92.761,39.624) 91.3,38.163 91.3,36.2 91.925,35.575 R19.1@92.4,35.575 92.4,36.8 93.8,38.2 MCU.34@93.8,42.685
  Bottom Layer w0.254: v1(92.761,39.624) 92.186,40.199 92.186,41.616 92.94,42.37 101.699,42.37 116.992,27.076 137.571,27.076 141.148,23.5 X1.A3@143.3,23.5
WHEELSPEED_RR: MCU.33 R21.1 X1.A4 | length 63.5
  Top Layer w0.254: R21.1@89.932,40.6 91.215,40.6 MCU.33@93.3,42.685 93.3,41.687 93,41.387 v1(93,40.993) ; v1(135.915,25.679) 136.736,26.5 X1.A4@143.3,26.5
  Bottom Layer w0.254: v1(93,40.993) 99.454,40.993 99.885,41.425 101.369,41.425 101.473,41.529 117.323,25.679 v1(135.915,25.679)
pads on no net: 5V_OUT.4 5V_OUT.8 12V_OUT_1.4 12V_OUT_1.8 12V_OUT_1.9 12V_OUT_1.13 12V_OUT_2.4 12V_OUT_2.8 AND.3 AND.11 BMS_OK.NC BSPD_OK.NC C_CA.3 C_CA.4 C_CA.5 FAN_EN_MOS.THM FAN_PWM_MOS.THM FLASH.7 FLASH.9 FLASH.MH1 FLASH.MH2 FTDI.3 FTDI.6 FTDI.8 FTDI.9 FTDI.10 FTDI.11 FTDI.12 FTDI.13 FTDI.14 FTDI.24 FTDI.27 FTDI.28 IMD_OK.NC J1.4 J1.6 J1.7 J1.8 J1.9 J1.10 J1.11 LATCH_RELAY.7 LDO.5 LDO.6 LDO.hole MC_PWR_SWITCH.3 MCU_REDUND_1.NC MCU_REDUND_2.NC X1.A11 X1.A12 X1.A16 X1.A17 X1.A18 X1.A29 X1.A30 X1.B6 X1.B7 X1.B8 X1.B9 X1.B10 X1.B11 X1.B12 X1.B13 X1.B14 X1.B15 X1.B16 X1.B17 X1.B18 X1.B19 X1.B20 X1.B21 X1.B22 X1.B23 X1.B24 X1.CH X1.LH X1.RH X2.1
copper on no net: | length 0.3
  Bottom Layer w0.254: 69.527,6.7 69.8,6.7

## Polygon pours and split planes (outlines as drawn)
5V on Top Layer "5V" (solid, pour order 56): 99.2,87.7 137.5,87.7 140.5,84.7 140.5,31.4 144.998,31.4 147.193,29.205 147.193,26.822 143.993,23.622 124.536,23.622 117.214,16.3 108.2,16.3 108.2,10.718 105.666,8.184 96.7,8.184 96.7,12.508 85.6,23.608 85.592,23.6 76.614,23.6 72.614,27.6 72.614,39.49 69.564,42.541 69.564,47.035 70.509,47.98 73.053,47.98 73.053,48.007 79.9,54.854 96.3,54.854 96.3,84.8
12V_PWR on Top Layer "12V_PWR_IN" (solid, remove dead copper, pour order 23): 151,19.1 149.1,17.2 149.1,15.2 147.6,13.7 131.4,13.7 131.4,6.7 132.1,6 156.7,6 156.7,19.1
GLV on Top Layer "GLV" (solid, pour order 36): 76.829,22.571 85.192,22.571 95.328,12.435 95.328,8.393 95.395,8.232 96.438,7.188 96.6,7.121 106.45,7.121 106.612,7.188 109.405,9.981 109.471,10.143 109.471,15.048 109.762,15.338 109.789,15.371 117.076,15.371 117.238,15.438 124.371,22.571 134.4,22.571 134.4,14.062 130.738,14.062 130.738,0 60.7,0 56.15,4.55 56.15,21.127 56.762,21.738 56.829,21.9 56.829,22.335 56.829,63.599 56.829,63.8 56.762,63.962 56.662,64.062 56.5,64.129 6.071,64.129 3.6,66.6 3.6,82.9 3.8,82.9 8.3,87.4 8.4,87.3 92.7,87.3 95.453,84.547 95.453,55.804 79.479,55.804 72.062,48.387 71.9,48.454 70.429,48.454 70.268,48.387 69.043,47.162 68.976,47 68.976,41.669 69.043,41.507 69.85,40.7 70.012,40.633 71.9,40.633 71.9,27.5
5V on Top Layer "5V_BSPD" (solid, pour order 54): 1.6,63.6 1.69,63.69 56.1,63.69 56.1,22.425 56.2,22.325 1.6,22.325 1.6,63.4 1.7,63.5
DGND on Bottom Layer "DGND" (solid, pour order 40): 0.1,88.6 0.5,88.2 162.8,88.2 162.8,0 0,0 0,88.2
AGND on Bottom Layer "AGND" (solid, pour order 28): 1.6,22.323 56.169,22.323 56.173,22.327 56.1,22.4 56.1,63.144 1.6,63.144

## Other copper
Top Layer:
  pour cut-out: 71.9,48.225
  pour cut-out: 1.1,63.8

## Silkscreen, mask and mechanical layers (free items; w line width, h text height)
Top Overlay:
  lines w0.254: 1.6,57.587 15.4,57.587 17.9,60.087 17.9,63.544 ; 120.35,72.617 120.35,47.217 133.1,47.217 133.1,72.617 120.4,72.617 ; 1.6,22.2 56.1,22.2 56.1,63.637 1.6,63.637 1.6,22.2
  text "BSPD" at 2.146,58.246 h3.5

## Text inside footprints (layer, text, board x,y; h text height)
BSPD_OK: Top Overlay "*" at 32.776,57.128 h1.52 r180
X1: Top Overlay "SUPER SEAL 60POS" at 139.766,13.806 h1.52 r90